# Allegro board RGB_LED_SHIELD_FINAL.brd
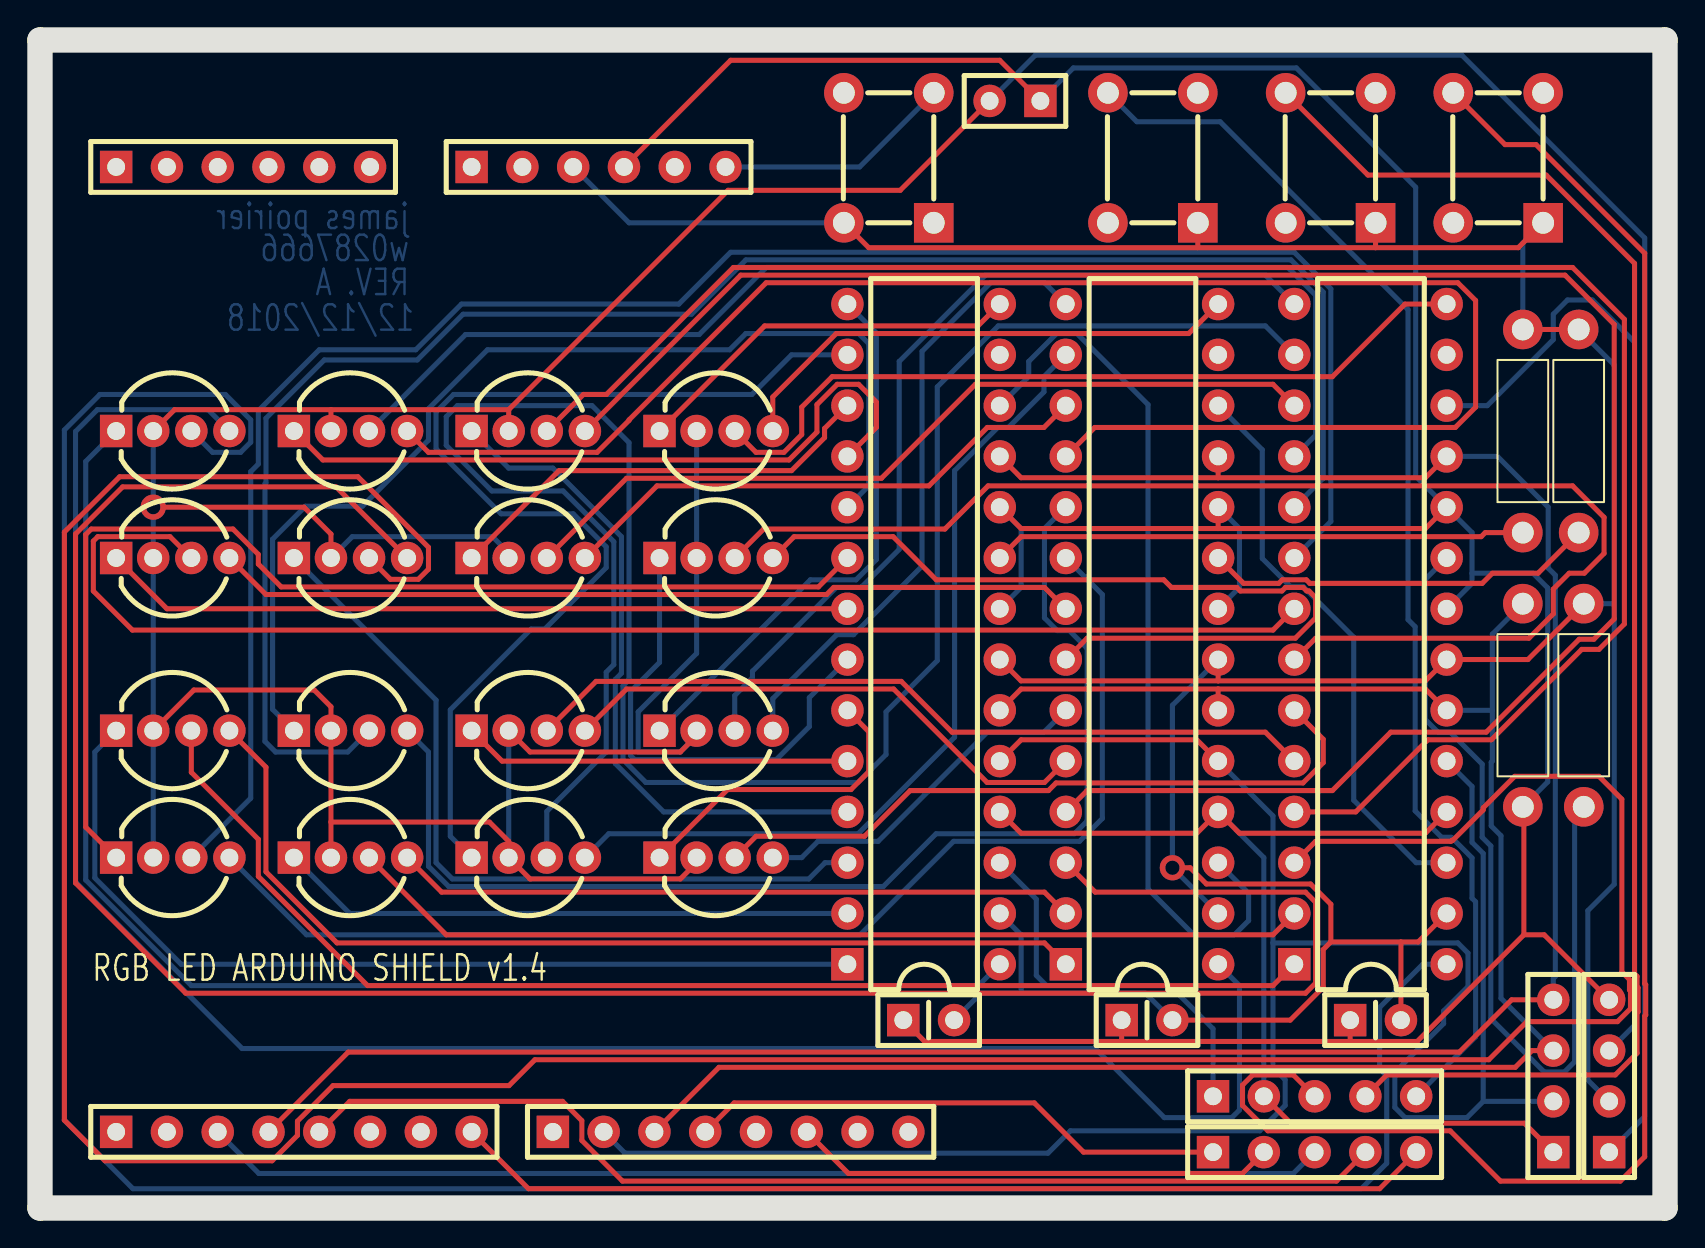
[diagram p0: board, top side]
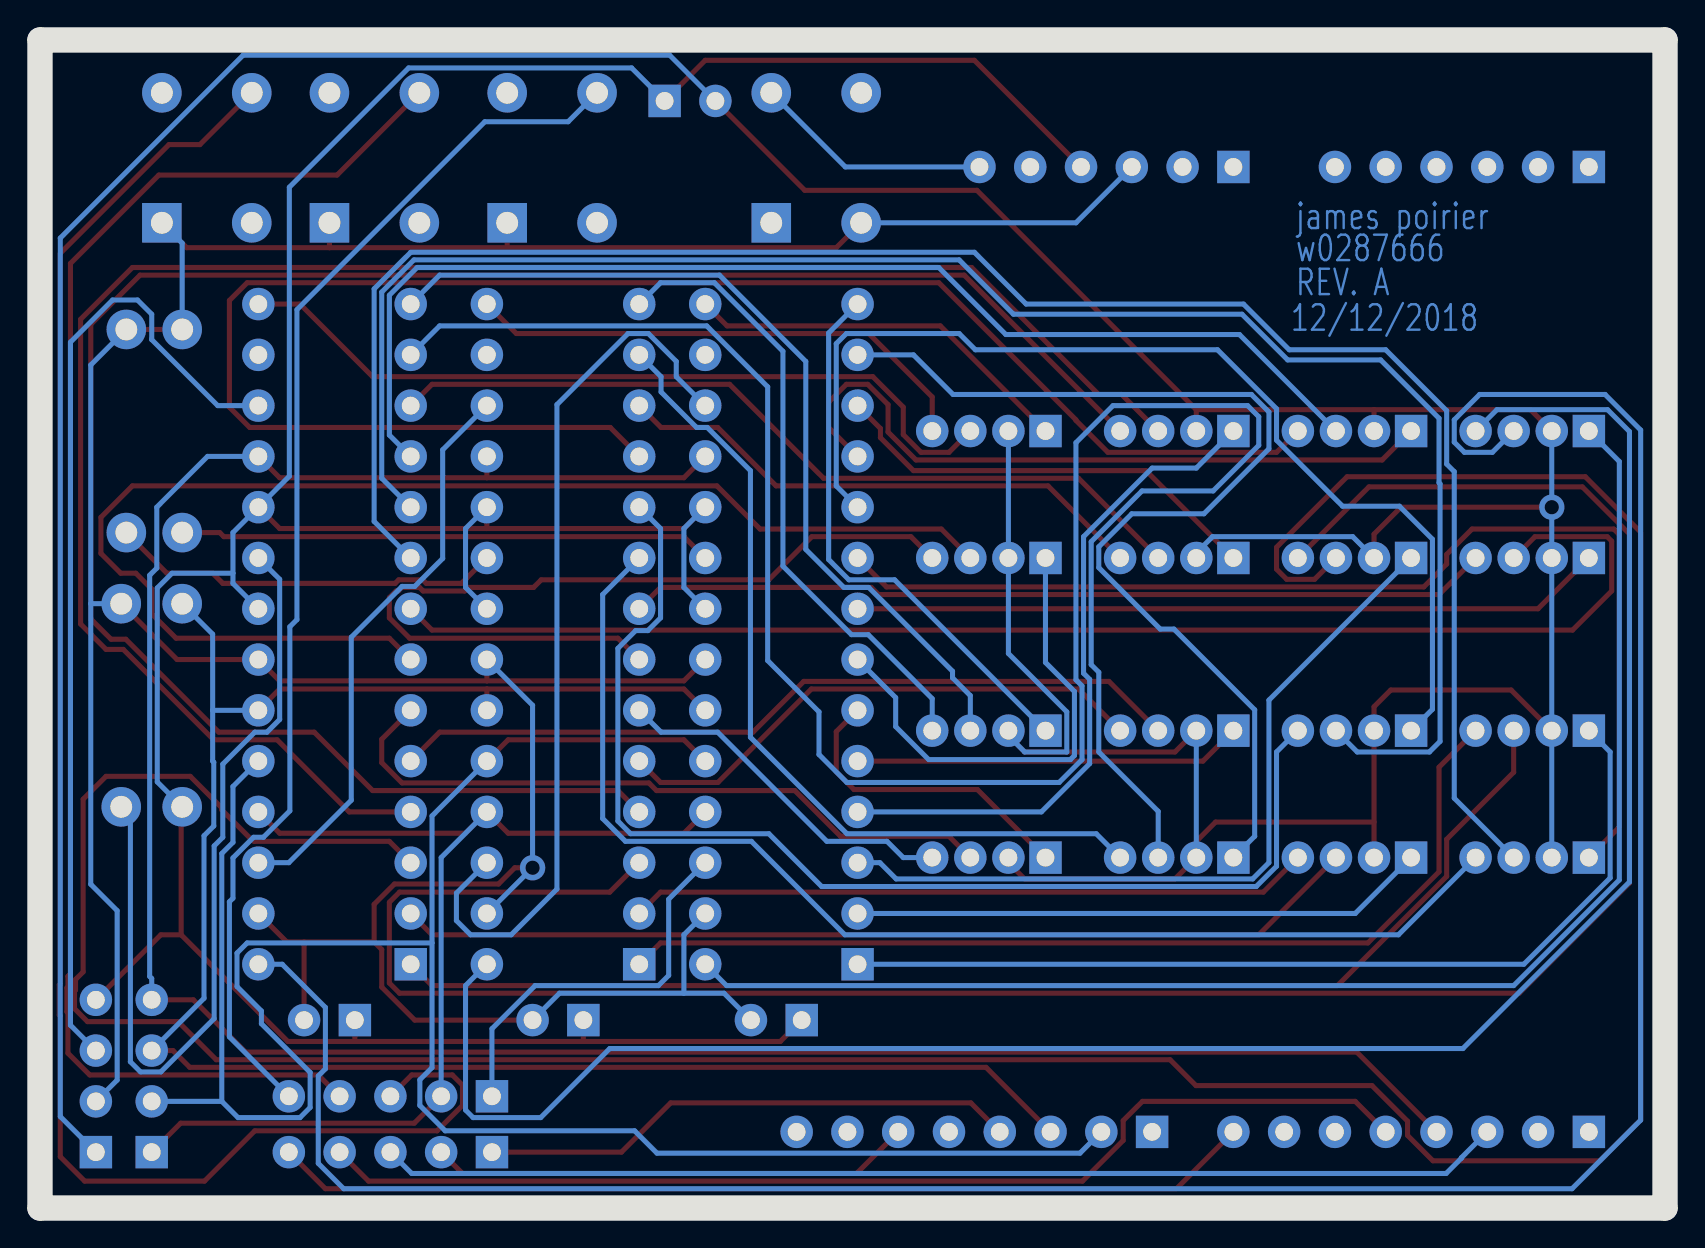
[diagram p1: board, bottom side, seen from below]

Outline 81.28 x 58.42 mm; copper layers: TOP, BOTTOM. Coordinates in mm from the lower left corner of the outline.
Outline path: 0,58.42 0,0 81.28,0 81.28,58.42 0,58.42

## Design rules (mm)
constraint set DEFAULT: min track width 0.254

## Placement (name value [footprint] x y rotation side)
C1  0.1uF  [CCAP100]  54.1 9.4 0 top
C2  0.1uF  [CCAP100]  65.53 9.4 0 top
C3  0.1uF  [CCAP100]  43.18 9.4 0 top
D1  LED  [RGB]  3.81 38.86 0 top
D2  LED  [RGB]  3.81 32.51 0 top
D3  LED  [RGB]  3.81 23.88 0 top
D4  LED  [RGB]  3.81 17.53 0 top
D5  LED  [RGB]  12.7 17.53 0 top
D6  LED  [RGB]  12.7 23.88 0 top
D7  LED  [RGB]  12.7 32.51 0 top
D8  LED  [RGB]  12.7 38.86 0 top
D9  LED  [RGB]  21.59 38.86 0 top
D10  LED  [RGB]  21.59 32.51 0 top
D11  LED  [RGB]  21.59 23.88 0 top
D12  LED  [RGB]  21.59 17.53 0 top
D13  LED  [RGB]  30.99 17.53 0 top
D14  LED  [RGB]  30.99 23.88 0 top
D15  LED  [RGB]  30.99 32.51 0 top
D16  LED  [RGB]  30.99 38.86 0 top
IC1  TLC5940NT  [DIP28_S]  40.39 12.19 90 top
IC2  TLC5940NT  [DIP28_S]  51.31 12.19 90 top
IC3  TLC5940NT  [DIP28_S]  62.74 12.19 90 top
J1  -  [CON5]  58.67 5.59 0 top
J2  ARDUINO POWER  [CON6]  21.59 52.07 0 top
J3  -  [CON5]  58.67 2.79 0 top
J4  ARDUINO ANALOG  [CON6]  3.81 52.07 0 top
J5  ARDUINO D13-8  [CON8]  25.65 3.81 0 top
J6  -  [CON4]  78.49 2.79 90 top
J7  -  [CON4]  75.69 2.79 90 top
J8  ARDUINO D7-0  [CON8]  3.81 3.81 0 top
J9  -  [CON2]  50.04 55.37 180 top
R1  2k  [RES400]  74.17 33.78 0 top
R2  10k  [RES400]  74.17 20.07 0 top
R3  2k  [RES400]  76.96 33.78 0 top
R4  2k  [RES400]  77.22 20.07 0 top
SW1  B3F  [SWITCH]  57.91 49.28 90 top
SW2  B3F  [SWITCH]  66.8 49.28 90 top
SW3  B3F  [SWITCH]  75.18 49.28 90 top
SWRESET1  B3F  [SWITCH]  44.7 49.28 90 top

## Library data of the parts
C1-C3 = CAP NP
D1-D16 = LED
IC1-IC3 = TLC5940NT
J1 J3 = CON5
J2 J4 = CON6
J5 J8 = CON8
J6 J7 = CON4
J9 = CON2
R1-R4 = RESISTOR: Tolerance: ***; User Part Number: ***
SW1-SW3 SWRESET1 = B3F

## Footprints (pads in the part's own frame, mm; a bottom-side part is the same pattern mirrored in y, then rotated)
CCAP100
  rect 1.626x1.626 hole 0.889: 1(0,0)
  round 1.626 hole 0.889: 2(2.54,0)
CON2
  rect 1.626x1.626 hole 0.889: 1(0,0)
  round 1.626 hole 0.889: 2(2.54,0)
CON4
  rect 1.626x1.626 hole 0.889: 1(0,0)
  round 1.626 hole 0.889: 2(2.54,0) 3(5.08,0) 4(7.62,0)
CON5
  rect 1.626x1.626 hole 0.889: 1(0,0)
  round 1.626 hole 0.889: 2(2.54,0) 3(5.08,0) 4(7.62,0) 5(10.16,0)
CON6
  rect 1.626x1.626 hole 0.889: 1(0,0)
  round 1.626 hole 0.889: 2(2.54,0) 3(5.08,0) 4(7.62,0) 5(10.16,0) 6(12.7,0)
CON8
  rect 1.626x1.626 hole 0.889: 1(0,0)
  round 1.626 hole 0.889: 2(2.54,0) 3(5.08,0) 4(7.62,0) 5(10.16,0) 6(12.7,0) 7(15.24,0) 8(17.78,0)
DIP28_S
  rect 1.626x1.626 hole 0.889: 1(0,0)
  round 1.626 hole 0.889: 2(2.54,0) 3(5.08,0) 4(7.62,0) 5(10.16,0) 6(12.7,0) 7(15.24,0) 8(17.78,0) 9(20.32,0) 10(22.86,0) 11(25.4,0) 12(27.94,0) 13(30.48,0) 14(33.02,0) 15(33.02,-7.62) 16(30.48,-7.62) 17(27.94,-7.62) 18(25.4,-7.62) 19(22.86,-7.62) 20(20.32,-7.62) 21(17.78,-7.62) 22(15.24,-7.62) 23(12.7,-7.62) 24(10.16,-7.62) 25(7.62,-7.62) 26(5.08,-7.62) 27(2.54,-7.62) 28(0,-7.62)
RES400
  round 1.981 hole 1.092: 1(0,0) 2(0,10.16)
RGB
  rect 1.626x1.626 hole 0.889: 1(0,0)
  round 1.626 hole 0.889: 2(1.854,0) 3(3.759,0) 4(5.664,0)
SWITCH
  rect 1.981x1.981 hole 1.092: 1(0,0)
  round 1.981 hole 1.092: 2(6.502,0) 3(0,4.496) 4(6.502,4.496)

## Nets
GND: C1.2 C2.2 C3.2 IC1.22 IC1.27 IC2.22 IC2.27 IC3.22 IC3.27 J2.3 J6.2 R1.2 R3.2 R4.2 SW1.1 SW2.1 SW3.1 SWRESET1.3
VCC: C1.1 C2.1 C3.1 IC1.19 IC1.21 IC2.19 IC2.21 IC3.19 IC3.21 J2.4 J6.4 J9.1 R2.1
B1,1: D1.4 IC2.28
B1,2: D3.4 IC2.1
B1,3: D5.4 IC2.2
B1,4: D7.4 IC2.3
B2,1: D9.4 IC2.4
B2,2: D11.4 IC2.5
B2,3: D13.4 IC2.6
B2,4: D15.4 IC2.7
B3,1: D2.4 IC2.8
B3,2: D4.4 IC2.9
B3,3: D6.4 IC2.10
B3,4: D8.4 IC2.11
B4,1: D10.4 IC2.12
B4,2: D12.4 IC2.13
B4,3: D14.4 IC2.14
B4,4: D16.4 IC2.15
BLANK: IC1.23 IC2.23 IC3.23 J5.3 J7.3 R2.2
G1,1: D1.3 IC3.28
G1,2: D3.3 IC3.1
G1,3: D5.3 IC3.2
G1,4: D7.3 IC3.3
G2,1: D9.3 IC3.4
G2,2: D11.3 IC3.5
G2,3: D13.3 IC3.6
G2,4: D15.3 IC3.7
G3,1: D2.3 IC3.8
G3,2: D4.3 IC3.9
G3,3: D6.3 IC3.10
G3,4: D8.3 IC3.11
G4,1: D10.3 IC3.12
G4,2: D12.3 IC3.13
G4,3: D14.3 IC3.14
G4,4: D16.3 IC3.15
GSCLK: IC1.18 IC2.18 IC3.18 J7.4 J8.4
R1,1: D1.1(RED) IC1.28
R1,2: D3.1(RED) IC1.1
R1,3: D5.1(RED) IC1.2
R1,4: D7.1(RED) IC1.3
R2,1: D9.1(RED) IC1.4
R2,2: D11.1(RED) IC1.5
R2,3: D13.1(RED) IC1.6
R2,4: D15.1(RED) IC1.7
R3,1: D2.1(RED) IC1.8
R3,2: D4.1(RED) IC1.9
R3,3: D6.1(RED) IC1.10
R3,4: D8.1(RED) IC1.11
R4,1: D10.1(RED) IC1.12
R4,2: D12.1(RED) IC1.13
R4,3: D14.1(RED) IC1.14
R4,4: D16.1(RED) IC1.15
SCLK: IC1.25 IC2.25 IC3.25 J1.2 J7.1
SCLK_DEF: J3.2 J5.6
SIN: IC1.26 J1.1
SIN_DEF: J3.1 J5.4
SOUT: IC3.17 J6.3
SW1_DEF: J3.3 J8.3
SW2_DEF: J3.4 J8.5
SW3_DEF: J3.5 J8.8
VLED: D1.2 D2.2 D3.2 D4.2 D5.2 D6.2 D7.2 D8.2 D9.2 D10.2 D11.2 D12.2 D13.2 D14.2 D15.2 D16.2 J6.1 J9.2
XLAT: IC1.24(XLAT) IC2.24(XLAT) IC3.24(XLAT) J5.2 J7.2
N05073: J1.3 SW3.4
N05089: J1.5 SW1.4
N07044: IC1.17 IC2.26
N07056: IC2.17 IC3.26
N09571: J2.6 SWRESET1.2
N11452: J1.4 SW2.4
N020590: IC3.20 R4.1
N0395721: IC1.20 R1.1
N0404021: IC2.20 R3.1

Pads without a net: IC1 16; IC2 16; IC3 16; J2 1 2 5; J4 1 2 3 4 5 6; J5 1 5 7 8; J8 1 2 6 7; SW1 2 3; SW2 2 3; SW3 2 3; SWRESET1 1 4

## Via types
v1: diameter 1.27, hole 0.711, TOP to BOTTOM, 2 vias

## Routing (per net, layer and track width the routed paths; a pad name or vN(x,y) marks a point on that pad's centre or on a via; arc(x,y) is an arc through that point)
GND: length 198.5
  TOP w0.254: SW1.1 57.91,48.03 ; 57.91,48.03 66.8,48.03 ; 57.91,48.03 41.45,48.03 SWRESET1.3 ; 64.57,13.31 64.57,15.19 63.55,16.21 58.34,16.21 57.53,17.02 v1(56.64,17.02) ; 64.57,13.31 64.57,13.31 68.07,13.31 ; 64.57,13.31 64.19,12.93 64.19,11.05 62.53,9.4 C1.2 ; R4.2 74.42,27.43 IC3.22 69.29,26.37 58.93,26.37 ; 66.8,48.03 SW2.1 ; 66.8,48.03 73.94,48.03 SW3.1 ; C2.2 68.07,13.31 ; 68.07,13.31 68.93,13.31 IC3.27 ; 58.93,26.37 49.07,26.37 IC1.22 ; 58.93,26.37 IC2.22 ; R1.2 R3.2
  BOTTOM w0.254: SW3.1 74.17,48.26 R1.2 ; 49.07,10.74 49.07,13.67 IC1.27 ; 49.07,10.74 47.07,10.74 C3.2 ; 49.07,10.74 55.3,10.74 C1.2 ; 78.74,30.23 78.74,16.19 77.42,14.87 77.42,6.4 J6.2 ; 78.74,30.23 R4.2 ; 78.74,30.23 78.74,42.16 R3.2 ; IC2.22 56.64,25.15 v1(56.64,17.02) IC2.27 ; J2.3 29.46,49.28 SWRESET1.3
VCC: length 168.2
  TOP w0.254: 58.93,33.99 IC2.19 ; 58.93,33.99 49.07,33.99 IC1.19 ; 58.93,33.99 69.29,33.99 IC3.19 ; 74.22,13.67 74.22,20.02 R2.1 ; 74.22,13.67 68.88,8.33 65.53,8.33 ; 74.22,13.67 75.23,13.67 J6.4 ; C3.1 44.25,8.33 54.1,8.33 ; C2.1 65.53,8.33 ; 65.53,8.33 54.1,8.33 ; J2.4 34.54,57.4 48.01,57.4 J9.1 ; 54.1,8.33 C1.1
  BOTTOM w0.254: R2.1 75.41,21.31 75.41,31.01 74.68,31.75 71.63,31.75 ; IC2.19 59.99,33.99 59.99,31.04 IC2.21 ; 71.63,31.75 71.63,31.24 IC3.21 ; 71.63,31.75 71.63,33.78 IC3.19 68.81,36.6 68.81,51.05 62.84,57.02 51.69,57.02 J9.1 ; IC1.21 49.07,31.04 49.07,33.99 IC1.19
B1,1: length 102.1
  BOTTOM w0.254: D1.4 8.41,39.93 2.87,39.93 1.78,38.84 1.78,16.31 10.11,7.98 52.78,7.98 56.24,4.52 59.61,4.52 59.99,4.9 59.99,11.13 IC2.28
B1,2: length 49.7
  TOP w0.254: D3.4 11.3,22.05 11.3,16.81 14.86,13.26 50.24,13.26 IC2.1
B1,3: length 34.1
  TOP w0.254: IC2.2 50.24,15.8 20.09,15.8 D5.4
B1,4: length 118.4
  TOP w0.254: D7.4 14.81,36.07 4.13,36.07 1.78,33.71 1.78,16.26 7.29,10.74 63.3,10.74 63.8,11.25 63.8,15.29 63.3,15.8 52.78,15.8 IC2.3
B2,1: length 101.9
  TOP w0.254: IC2.4 52.37,20.88 64.64,20.88 67.56,23.8 72.34,23.8 76.99,28.45 77.72,28.45 78.74,29.46 78.74,44.2 76.28,46.66 35.05,46.66 D9.4
B2,2: length 27.3
  TOP w0.254: D11.4 29.34,25.96 42.7,25.96 47.37,21.29 50.24,21.29 IC2.5
B2,3: length 17.7
  BOTTOM w0.254: IC2.6 50.22,23.8 47.38,23.8 41.92,18.34 38.91,18.34 38.1,17.53 D13.4
B2,4: length 43.4
  TOP w0.254: D15.4 37.72,33.58 42.67,33.58 44.83,31.42 56.21,31.42 56.59,31.04 59.86,31.04 60.04,30.86 62.12,30.86 62.3,31.04 63.18,31.04 63.36,30.86 63.47,30.86 63.8,30.53 63.8,29.51 62.79,28.5 52.37,28.5 IC2.7
B3,1: length 43.2
  TOP w0.254: D2.4 11.3,30.68 39.34,30.68 39.7,31.04 50.24,31.04 IC2.8
B3,2: length 61.5
  BOTTOM w0.254: D4.4 13.34,13.67 41.02,13.67 45.69,18.34 51.99,18.34 53.14,19.48 53.14,30.68 IC2.9
B3,3: length 59.3
  BOTTOM w0.254: D6.4 19.43,22.81 19.43,17.09 20.45,16.08 42.18,16.08 44.82,18.72 51.74,18.72 52.37,19.35 52.37,27.99 51.49,28.88 50.88,28.88 50.24,29.51 50.24,33.99 IC2.10
B3,4: length 84.6
  TOP w0.254: D8.4 19.43,37.8 27.86,37.8 29.46,39.4 29.46,39.42 36.32,46.28 70.92,46.28 71.81,45.39 71.81,40.06 70.79,39.04 52.76,39.04 IC2.11
B4,1: length 27.2
  TOP w0.254: IC2.12 50.22,39.04 47.38,39.04 44.46,36.12 30.86,36.12 D10.4
B4,2: length 42.7
  BOTTOM w0.254: IC2.13 50.22,41.58 50.22,40.82 48.44,39.04 47.9,39.04 45.75,36.88 45.75,23.55 40.92,18.72 28.45,18.72 D12.4
B4,3: length 31.6
  BOTTOM w0.254: IC2.14 50.24,46.28 47.55,46.28 44.12,42.85 44.12,32.11 40.69,28.68 39.85,28.68 36.65,25.48 D14.4
B4,4: length 25.9
  TOP w0.254: D16.4 36.65,40.56 39.83,43.74 57.45,43.74 IC2.15
BLANK: length 97.5
  TOP w0.254: IC3.23 69.29,25.96 58.93,25.96 ; IC1.23 49.07,25.96 58.93,25.96 ; J5.3 33.96,7.04 73.79,7.04 74.63,7.87 J7.3 ; 58.93,25.96 IC2.23
  BOTTOM w0.254: 72.64,24.89 72.64,22.35 72.59,22.3 72.59,19.11 73.08,18.62 73.08,10.49 J7.3 ; 72.64,24.89 IC3.23 ; 72.64,24.89 72.64,28.7 R2.2
G1,1: length 130.1
  BOTTOM w0.254: IC3.28 69.16,12.19 67.01,10.03 67.01,6.96 67.36,6.6 67.36,2.24 66.09,0.97 4.65,0.97 1.22,4.39 1.22,38.91 3,40.69 9.27,40.69 10.54,39.42 10.54,38.3 10.03,37.8 8.64,37.8 D1.3
G1,2: length 63.2
  TOP w0.254: D3.3 7.57,21.79 10.92,18.44 10.92,16.59 16.38,11.13 61.67,11.13 IC3.1
G1,3: length 48.3
  TOP w0.254: IC3.2 61.67,13.67 20.32,13.67 D5.3
G1,4: length 167.1
  TOP w0.254: D7.3 17.53,31.45 18.92,31.45 19.43,31.95 19.43,33.05 15.9,36.58 3.99,36.58 1.22,33.81 1.22,4.39 3.25,2.36 11.61,2.36 12.88,3.63 12.88,4.34 14.66,6.12 23.46,6.12 24.76,7.42 72.47,7.42 74.37,9.32 78.9,9.32 79.55,9.97 79.55,10.86 79.5,10.91 79.5,11.43 79.12,11.81 79.12,20.45 77.98,21.59 73.76,21.59 72.19,20.02 72.19,19.91 70.66,18.39 70.62,18.39 70.57,18.34 63.8,18.34 IC3.3
G2,1: length 94
  TOP w0.254: IC3.4 65.81,19.81 69.42,23.42 72.59,23.42 77.11,27.94 77.98,27.94 79.25,29.21 79.25,44.45 76.66,47.04 34.68,47.04 28.33,40.69 27.18,40.69 D9.3
G2,2: length 40.1
  TOP w0.254: IC3.5 61.29,23.8 45.62,23.8 43.08,26.34 27.81,26.34 D11.3
G2,3: length 34.6
  TOP w0.254: IC3.6 64.19,23.44 64.19,22.28 63.17,21.26 50.82,21.26 50.44,20.88 43.52,20.88 41.24,18.59 35.81,18.59 D13.3
G2,4: length 65.9
  TOP w0.254: D15.3 36.2,33.96 45.26,33.96 47.42,36.12 76.66,36.12 78.23,34.54 78.23,32.74 77.24,31.75 76.49,31.75 75.69,30.96 75.69,29.72 74.47,28.5 63.8,28.5 IC3.7
G3,1: length 69.3
  TOP w0.254: IC3.8 61.67,28.91 4.62,28.91 2.67,30.86 2.67,33.35 2.89,33.58 6.5,33.58 D2.3
G3,2: length 95.6
  BOTTOM w0.254: D4.3 10.54,20.5 10.54,36.83 10.92,37.21 10.92,39.88 13.97,42.93 18.8,42.93 21.08,45.21 31.95,45.21 34.54,47.8 62.73,47.8 64.57,45.97 64.57,34.34 IC3.9
G3,3: length 90.2
  BOTTOM w0.254: IC3.10 64.19,36.5 64.19,45.81 62.58,47.42 35.31,47.42 32.59,44.7 21.16,44.7 18.87,42.42 14.22,42.42 11.3,39.5 11.3,36.27 11.25,36.22 11.25,23.34 11.78,22.81 15.39,22.81 D6.3
G3,4: length 59.8
  BOTTOM w0.254: D8.3 21.29,43.69 32.97,43.69 36.32,47.04 62.42,47.04 63.8,45.65 63.8,38.66 IC3.11
G4,1: length 41.4
  TOP w0.254: IC3.12 61.67,41.2 46.79,41.2 42.09,36.5 29.34,36.5 D10.3
G4,2: length 108.5
  BOTTOM w0.254: D12.3 25.35,19.84 28.32,22.81 28.32,26.8 28.7,27.18 28.7,33.32 26.16,35.86 22.6,35.86 20.32,38.15 20.32,39.58 20.87,40.13 27.61,40.13 29.46,38.28 29.46,26.42 29.16,26.11 29.16,22.43 30.3,21.29 40.92,21.29 42.32,22.68 42.32,24.82 44.88,27.38 44.88,41.07 47.93,44.12 61.29,44.12 IC3.13
G4,3: length 44.8
  BOTTOM w0.254: D14.3 34.75,25.63 35.64,26.52 35.64,26.85 39.83,31.04 41.07,31.04 42.98,32.94 42.98,42.34 47.29,46.66 61.29,46.66 IC3.14
G4,4: length 39.9
  TOP w0.254: IC3.15 68.28,45.21 64.64,41.58 39.62,41.58 38.1,40.06 38.1,38.68 37.21,37.8 35.81,37.8 D16.3
GSCLK: length 122.3
  TOP w0.254: J8.4 15.42,7.8 70.99,7.8 73.61,10.41 J7.4 ; IC2.18 58.93,36.53 ; 58.93,36.53 69.29,36.53 IC3.18 ; 58.93,36.53 49.07,36.53 IC1.18
  BOTTOM w0.254: IC3.18 72.9,37.59 75.44,35.05 75.44,32 75.79,31.65 75.79,11.58 75.69,11.48 J7.4
R1,1: length 71.4
  BOTTOM w0.254: IC1.28 46.94,11.13 7.57,11.13 2.29,16.41 2.29,37.34 D1.1
R1,2: length 47.2
  BOTTOM w0.254: IC1.1 7.06,12.19 2.74,16.51 2.74,22.81 D3.1
R1,3: length 28.8
  BOTTOM w0.254: IC1.2 15.49,14.73 D5.1
R1,4: length 39.4
  BOTTOM w0.254: IC1.3 39.27,17.27 38.46,16.46 20.62,16.46 19.81,17.27 19.81,25.4 D7.1
R2,1: length 33.8
  BOTTOM w0.254: D9.1 23.44,37.01 25.65,37.01 29.08,33.58 29.08,26.75 28.78,26.44 28.78,22.23 31.19,19.81 IC1.4
R2,2: length 19.4
  TOP w0.254: IC1.5 23.11,22.35 D11.1
R2,3: length 15.8
  TOP w0.254: IC1.6 41.45,23.83 41.45,21.82 40.56,20.93 34.39,20.93 D13.1
R2,4: length 24.3
  BOTTOM w0.254: IC1.7 38.48,25.53 38.48,24.08 36.83,22.43 29.74,22.43 29.54,22.63 29.54,25.84 30.99,27.29 D15.1
R3,1: length 37.6
  TOP w0.254: D2.1 6.35,29.97 IC1.8
R3,2: length 57.1
  TOP w0.254: D4.1 2.29,19.05 2.29,33.68 2.57,33.96 9.65,33.96 10.92,32.69 10.92,32.21 12.06,31.06 38.94,31.06 IC1.9
R3,3: length 53.8
  BOTTOM w0.254: IC1.10 41.45,36.12 41.45,43.23 40.94,43.74 35.31,43.74 34.49,42.93 22.38,42.93 19.43,39.97 19.43,38.4 16.13,35.1 13.28,35.1 11.63,33.45 11.63,24.94 D6.1
R3,4: length 35.8
  TOP w0.254: IC1.11 41.83,39.04 41.83,40.31 40.94,41.2 39.88,41.2 38.86,40.18 38.86,38.81 37.47,37.41 14.15,37.41 D8.1
R4,1: length 22.2
  TOP w0.254: IC1.12 39.24,38.99 39.24,38.53 37.59,36.88 25.96,36.88 D10.1
R4,2: length 53.8
  BOTTOM w0.254: IC1.13 37.59,42.67 35.61,40.69 20.69,40.69 19.81,39.82 19.81,37.97 23.06,34.72 26.67,34.72 28.32,33.07 28.32,32.03 25.25,28.96 24.56,28.96 20.52,24.92 20.52,18.59 D12.1
R4,3: length 27.8
  BOTTOM w0.254: D14.1 38.53,31.42 40.82,31.42 41.83,32.44 41.83,43.76 IC1.14
R4,4: length 19.6
  TOP w0.254: D16.1 36.25,44.12 46.91,44.12 IC1.15
SCLK: length 54.9
  TOP w0.254: J1.2 62.56,4.24 74.24,4.24 J7.1 ; IC1.25 49.07,18.75 57.86,18.75 IC2.25 59.99,18.75 69.29,18.75 IC3.25
  BOTTOM w0.254: J1.2 61.21,17.53 IC2.25
SCLK_DEF: length 24.2
  TOP w0.254: J3.2 60.15,1.73 40.44,1.73 J5.6
SIN: length 19.7
  BOTTOM w0.254: J1.1 58.67,8.97 56.52,11.13 50.34,11.13 49.83,11.63 49.83,15.44 IC1.26
SIN_DEF: length 27
  TOP w0.254: J5.4 34.72,5.26 49.73,5.26 52.2,2.79 J3.1
SOUT: length 49.2
  BOTTOM w0.254: J6.3 79.76,9.14 79.76,43.31 77.65,45.42 76.4,45.42 75.69,44.7 75.69,43.43 72.39,40.13 IC3.17
SW1_DEF: length 56.2
  BOTTOM w0.254: J8.3 10.19,2.51 10.19,2.49 10.95,1.73 62.69,1.73 J3.3
SW2_DEF: length 55.8
  TOP w0.254: J8.5 15.49,5.33 26.14,5.33 27.1,4.37 27.1,3.38 29.13,1.35 64.85,1.35 J3.4
SW3_DEF: length 49.2
  TOP w0.254: J3.5 67.01,0.97 24.43,0.97 J8.8
VLED: length 252.4
  TOP w0.254: D13.2 32.84,17.27 32.03,16.46 24.51,16.46 D12.2 23.44,18.34 22.48,19.3 14.55,19.3 ; D3.2 7.7,25.91 13.72,25.91 14.55,25.07 D6.2 14.55,19.3 ; D8.2 14.55,39.93 ; 14.55,39.93 6.73,39.93 D1.2 ; 14.55,39.93 23.44,39.93 ; 23.44,39.93 34.42,50.9 43.03,50.9 J9.2 ; 23.44,39.93 D9.2 ; D14.2 32.84,23.62 32.03,22.81 24.51,22.81 D11.2 ; v1(5.66,35.05) 13.21,35.05 14.55,33.71 D7.2 ; 14.55,19.3 D5.2
  BOTTOM w0.254: J6.1 80.26,4.57 80.26,48.51 71.12,57.66 49.78,57.66 J9.2 ; D16.2 D15.2 32.84,27.74 29.92,24.82 29.92,22.81 32.03,22.81 32.84,23.62 D14.2 ; D7.2 15.62,33.58 22.63,33.58 23.44,32.77 D10.2 ; D4.2 D3.2 D2.2 v1(5.66,35.05) D1.2 ; D12.2 D11.2
XLAT: length 111.4
  TOP w0.254: IC2.24 57.86,23.42 49.07,23.42 IC1.24
  BOTTOM w0.254: 72.19,5.33 72.19,17.73 71.63,18.29 71.63,21.08 IC3.24 ; 72.19,5.33 71.37,4.52 68.28,4.52 67.77,5.03 67.77,6.78 70.21,9.22 70.21,9.86 71.42,11.07 71.42,12.75 70.92,13.26 61.67,13.26 ; 72.19,5.33 J7.2 ; 61.67,13.26 61.67,19.61 IC2.24 ; 61.67,13.26 61.67,7.02 62.28,6.41 62.28,5.13 61.01,3.86 51.54,3.86 50.42,2.74 29.26,2.74 J5.2
N05073: length 85.6
  TOP w0.254: J1.3 62.69,6.65 60.66,6.65 60.15,6.15 60.15,5.13 61.42,3.86 70.54,3.86 73.05,1.35 79.04,1.35 80.26,2.57 80.26,9.61 80.31,9.66 80.31,11.17 80.26,11.22 80.26,47.75 74.83,53.19 73.28,53.19 SW3.4
N05089: length 61.8
  BOTTOM w0.254: J1.5 71.81,8.56 71.81,15.32 71.63,15.49 71.63,17.51 70.6,18.54 70.1,18.54 68.78,19.86 68.78,29.07 68.43,29.43 68.43,44.93 59.03,54.33 54.86,54.33 SW1.4
N07044: length 44.9
  BOTTOM w0.254: IC1.17 49.45,41.58 49.45,42.34 50.85,43.74 51.87,43.74 55.42,40.18 55.42,15.95 57.71,13.67 59.74,13.67 60.45,14.38 60.45,15.75 IC2.26
N07056: length 28.9
  BOTTOM w0.254: IC2.17 61.14,37.92 61.14,32.49 62.53,31.09 63.17,31.09 65.71,28.55 65.71,20.4 68.83,17.27 IC3.26
N09571: length 12
  BOTTOM w0.254: J2.6 41,52.07 SWRESET1.2
N11452: length 75.1
  TOP w0.254: J1.4 67.36,6.65 78.79,6.65 79.88,7.75 79.88,9.76 79.93,9.81 79.93,11.01 79.88,11.06 79.88,11.59 79.76,11.71 79.76,47.24 75.34,51.66 66.42,51.66 SW2.4
N020590: length 43.6
  BOTTOM w0.254: R4.1 76.76,19.61 76.76,7.32 76.25,6.81 75.23,6.81 72.57,9.47 72.57,18.11 72.14,18.54 72.14,22.2 70.54,23.8 69.93,23.8 69.29,24.43 69.29,31.45 IC3.20
N0395721: length 26.7
  TOP w0.254: IC1.20 49.07,33.58 72.09,33.58 72.29,33.78 R1.1
N0404021: length 19.8
  TOP w0.254: IC2.20 60.2,31.24 61.96,31.24 62.14,31.42 63.34,31.42 63.52,31.24 72.14,31.24 72.64,31.75 74.93,31.75 R3.1

## Text on the board
BOTTOM: james poirier | w0287666 | REV. A | 12/12/2018
Ref Des/Silkscreen Top: RGB LED ARDUINO SHIELD v1.4
COMPVAL_TYPE_TOP: FIGURE | FINISHED_SIZE | 28.0 | 35.0 | 43.0 | DRILL CHART: TOP to BOTTOM | ALL UNITS ARE IN MILS | TOOL_SIZE | - | 35 | 43 | PLATED | QTY | 2 | 202 | 24
